# Altium PCB CropSenseMovement.PcbDoc
Units mm, origin at the board's own origin, x right, y up, seen from the top; angles counter-clockwise.
Board outline 92 x 71 mm, 2 copper layers (Top, Bottom), stack 1.57 mm thick; 55 components, 56 nets, 252 pads, 31 vias.
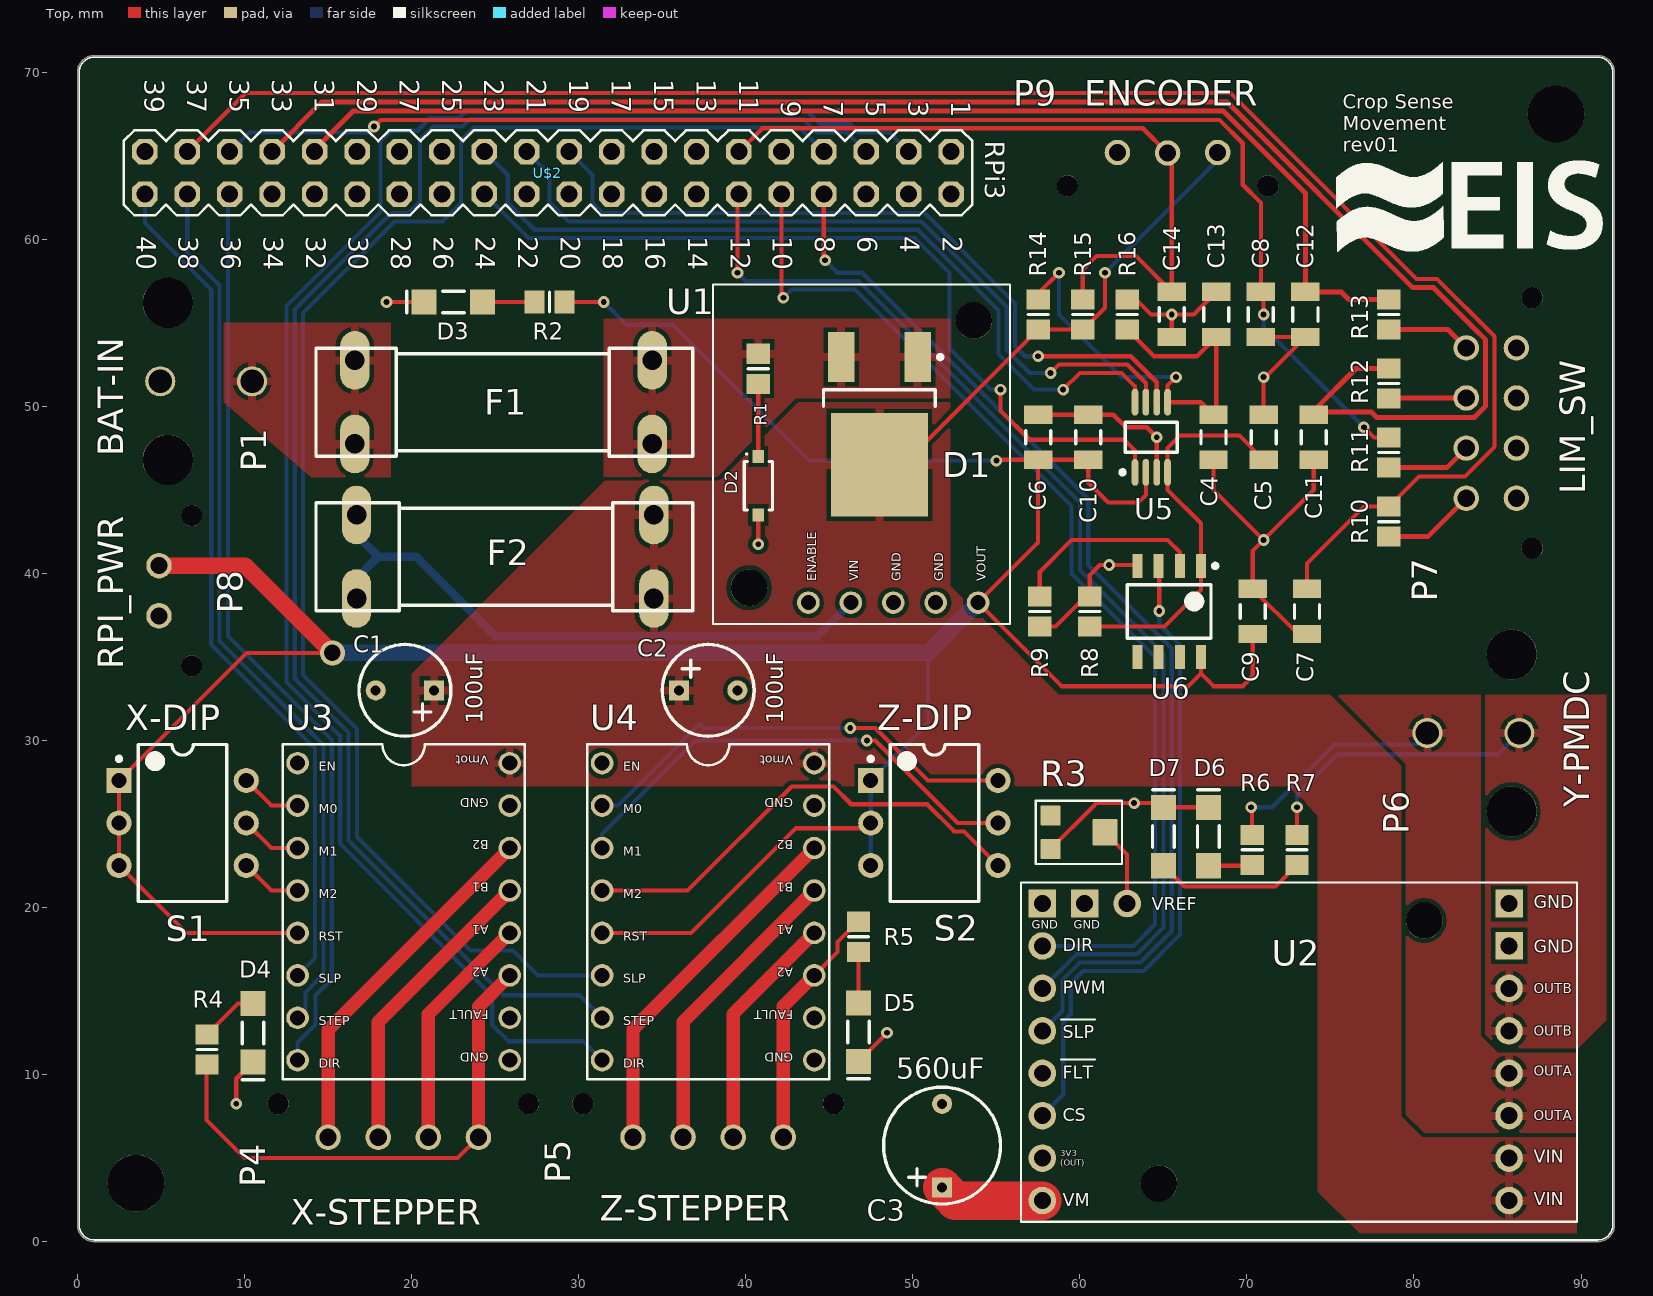
[diagram p0: Top view]
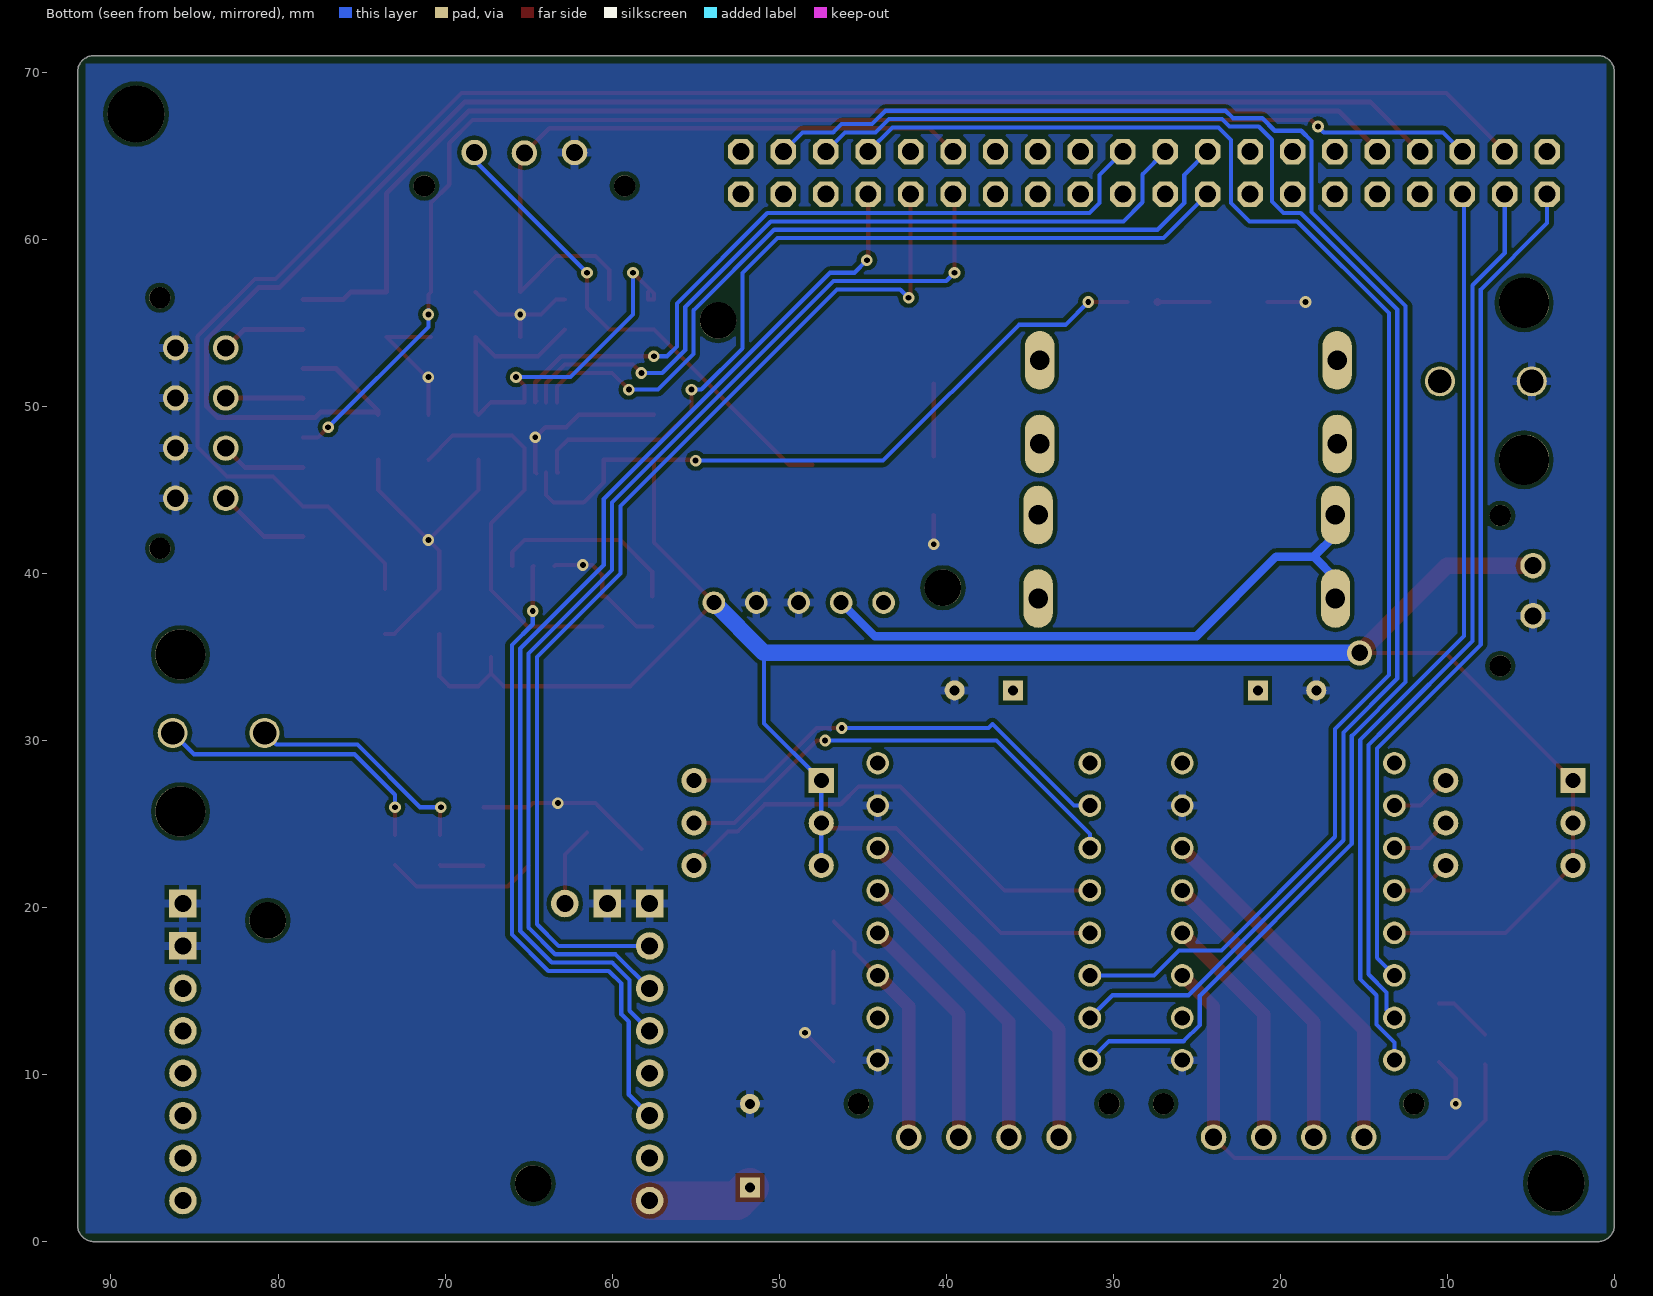
[diagram p1: Bottom view, seen from below]

## Layer stack, top to bottom
Top Solder: solder mask 0.0102, Solder Resist, Dk 3.5
Top: signal copper 0.035
Dielectric 1: core 1.5, FR-4, Dk 4.8
Bottom: signal copper 0.035
Bottom Solder: solder mask 0.0102, Solder Resist, Dk 3.5

## Board outline
0,1 0,70 cw(c1,70) 1,71 91,71 cw(c91,70) 92,70 92,1 cw(c91,1) 91,0 1,0 cw(c1,1) 0,1

## Design rules (kind name [scope] priority, off if disabled: settings)
Clearance [All] p1: gap=0.25
Clearance "Clearance (Same Net)" [All] p2: gap=0 except(0.203: SMDPad-SMDPad SMDPad-THPad SMDPad-Via)
HoleSize [All] p1: absolutevalues=TRUE maxlimit=6.2 minlimit=0.2 maxpercent=80.000 minpercent=20.000
HoleToHoleClearance mdViaViaSameLayer [All] p1: gap=0.203 allowstackedmicrovias=TRUE
HoleToHoleClearance [All] p2: gap=0.254 allowstackedmicrovias=TRUE
MinimumAnnularRing [All] p1: minimumring=0.15
MinimumSolderMaskSliver [All] p1: minsoldermaskwidth=0.045
PasteMaskExpansion mlMinCreamFrame [All] p1: expansion=0
PasteMaskExpansion [All] p2: expansion=0
PlaneConnect [All] p1: planeconnectstyle=Relief reliefexpansion=0.508 reliefentries=4 reliefconductorwidth=0.5 reliefairgap=0.254
PolygonConnect ThermalVias [IsVia] p1: connectstyle=Direct reliefconductorwidth=0.254 reliefentries=4 polygonreliefangle="90 Angle" airgapwidth=0.254
PolygonConnect [All] p2: connectstyle=Relief reliefconductorwidth=0.5 reliefentries=4 polygonreliefangle="90 Angle" airgapwidth=0.254
RoutingVias [All] p1: holewidth=0.35 width=0.7 viastyle="Through Hole" minholewidth=0.25 minwidth=0.5 maxholewidth=0.7 maxwidth=1.3
SilkToSilkClearance [All] p1 off: silktosilkclearance=0.254
SilkToSolderMaskClearance [IsPad] p1 off: minsilkscreentomaskgap=0.254 clearancetoexposedcopper=TRUE
SolderMaskExpansion mlMinStopFrame [All] p1: expansion=0.102
SolderMaskExpansion [All] p2: expansion=0.102
Width Width_HV [InNet('24V')] p1: maxlimit=5.5 minlimit=0.25 preferedwidth=5.22
Width [All] p2: maxlimit=4 minlimit=0.25 preferedwidth=0.25
23 further rules are at their usual default settings.

## Components (designator, comment, footprint, x,y, rotation, side; value= is the part's Value field where it differs from the comment)
C1 "100uF" "CAP 8MM" 21.35,33 r180 top
C2 "100uF" "CAP 8MM" 36,33 r0 top
C3 "560uF" "CAP 12.5MM" 51.75,3.25 r90 top
C4 "10nF" C1206 68,48.15 r270 top
C5 "10nF" C1206 71,48.15 r90 top
C6 "1uF" C1206 57.5,48.15 r270 top
C7 "100nF" C1206 73.595,37.725 r90 top
C8 "100nF" C1206 70.833,55.5 r90 top
C9 "10nF" C1206 70.345,37.725 r90 top
C10 "100nF" C1206 60.5,48.15 r270 top
C11 "100nF" C1206 74,48.15 r90 top
C12 "100nF" C1206 73.5,55.5 r90 top
C13 "1uF" C1206 68.167,55.5 r270 top
C14 "100nF" C1206 65.5,55.5 r90 top
D1 "MBRD835L" DPAK229P991X238-3N 48,48.85 r270 top
D2 "BZT52C24" SOD123 40.75,45.25 r90 top
D3 "GRN" "1206 SMD LED" 22.5,56.25 r180 top
D4 "BLU" "1206 SMD LED" 10.5,12.5 r270 top
D5 "BLU" "1206 SMD LED" 46.75,12.541 r270 top
D6 "BLU" "1206 SMD LED" 67.692,24.25 r90 top
D7 "RED" "1206 SMD LED" 65,24.25 r90 top
F1 "6A" 5X20MM_LITTLEFUSE_CARTRIDGE 25.5,50.25 r270 top
F2 "1A" 5X20MM_LITTLEFUSE_CARTRIDGE 25.6,41 r90 top
P1 "BAT-IN" MOLEX_MINI_1X2CCT 1.75,51.5 r270 top
P4 "X-STEPPER" MOLEX_MICRO_4X1CCT 19.5,8.75 r180 top
P5 "Z-STEPPER" MOLEX_MICRO_4X1CCT 37.75,8.75 r180 top
P6 "Y-PMDC" MOLEX_MINI_1X2CCT 89.504,30.45 r90 top
P7 "LIM_SW" MOLEX_MICRO_4X2CCT 88.629,49 r90 top
P8 "RPI_PWR" MOLEX_MICRO_2X1CCT 7.375,38.963 r90 top
P9 "ENCODER" MOLEX_MICRO_3X1CCT 65.25,62.696 r0 top
R1 "10K" 6-0805_N 40.75,52.25 r90 top
R2 "191" 6-0805_N 28.25,56.25 r0 top
R3 "50K" "TRIMPOT TC33" 60.05,24.5 r270 top
R4 "1.4K" 6-0805_N 7.75,11.5 r90 top
R5 "1.4K" 6-0805_N 46.75,18.25 r270 top
R6 "1.4K" 6-0805_N 70.308,23.448 r90 top
R7 "1.47K" 6-0805_N 73,23.448 r270 top
R8 "158K" 6-0805_N 60.595,37.725 r270 top
R9 "10K" 6-0805_N 57.595,37.725 r270 top
R10 "100K" 6-0805_N 78.5,43.1 r90 top
R11 "100K" 6-0805_N 78.5,47.233 r90 top
R12 "100K" 6-0805_N 78.5,51.367 r90 top
R13 "100K" 6-0805_N 78.5,55.5 r90 top
R14 "38.3K" 6-0805_N 57.5,55.5 r270 top
R15 "10K" 6-0805_N 60.167,55.5 r270 top
R16 "10K" 6-0805_N 62.833,55.5 r270 top
S1 "X-DIP" DIP-6 6.29,25.059 r0 top
S2 "Z-DIP" DIP-6 51.29,25.059 r0 top
U1 "DC/DC" D24VXXFX_BREAKOUT 46.925,47.14 r0 top
U2 "Y-DRIVER" 24V13_BREAKOUT 56.48,1.19 r0 top
U3 "X-DRIVER" DRV8825_BREAKOUT 19.521,19.75 r270 top
U4 "Z-DRIVER" DRV8825_BREAKOUT 37.75,19.75 r270 top
U5 "ADC082S021" TI-DGK8_N 64.275,48.15 r90 top
U6 "LM358DR" SOIC127P600X175-8N 65.345,37.725 r270 top
U$2 "RPI3-CON" CONNECTOR 28.16,63.98 r180 top

## Footprints (in the part's own frame and the unit in brackets; to place one, negate y for a bottom-side part, rotate by r counter-clockwise, add the part's x,y. Pads: shape width x height; smd on the part's side, far side on the other; paste and mask are expansions set on the pad)
5X20MM_LITTLEFUSE_CARTRIDGE [mm]
  oval 3.51x1.755 hole 1.17: 1(-2.5,-8.9) 1(2.5,-8.9) 2(-2.5,8.9) 2(2.5,8.9)
  silkscreen extent -3.23,-11.23 3.23,11.33
6-0805_N [mm] "Chip Resistor, Body 2.0x1.2mm, IPC Medium Density"
  rect 1.2x1.4 smd: 1(-0.9,0) 2(0.9,0)
  silkscreen extent 0,-0.6 0,0.6, body extent -1.07,-0.7 1.07,0.7, height 0.7
24V13_BREAKOUT [mil]
  round 65 hole 40: 3V3(50,150) CS(50,250) DIR(50,650) FLT(50,350) OUTA(1150,250) OUTA(1150,350) OUTB(1150,450) OUTB(1150,550) PWM(50,550) SLP(50,450) VIN(1150,50) VIN(1150,150) VM(50,50) VREF(250,750)
  rect 65x65 hole 40: GND(50,750) GND(150,750) GND(1150,650) GND(1150,750)
  round 85.98 hole 85.98 unplated: HOLE(325,90) HOLE(950,710)
  silkscreen extent 0,0 1310,800
"1206 SMD LED" [mm] "Chip Diode, 2-Leads, Body 3.20x1.60mm, IPC Medium Density"
  rect 1.5x1.5 smd: 1(-1.75,0) 2(1.75,0)
  silkscreen extent -0.65,-0.65 2.8,0.65, body extent -1.6,-0.8 1.6,0.8, height 1.1
C1206 [mm] "Chip Capacitor, Body 3.2x1.6mm, IPC High Density"
  rect 1.1x1.7 smd: 1(-1.35,0) 2(1.35,0)
  silkscreen extent -0.4,-0.75 0.4,0.75, body extent -1.7,-0.9 1.7,0.9, height 1.3
"CAP 8MM" [mm]
  rect 1.2x1.2 hole 0.6: 1(0,0)
  round 1.2 hole 0.6: 2(3.5,0)
  silkscreen extent -1,-2.75 4.5,2.75
"CAP 12.5MM" [mm]
  rect 1.2x1.2 hole 0.6: 1(0,0)
  round 1.2 hole 0.6: 2(5,0)
  silkscreen extent -1,-3.5 6,3.5
CONNECTOR [mil]
  oct 60x60 hole 40: 1(-950,-50) 2(-950,50) 3(-850,-50) 4(-850,50) 5(-750,-50) 6(-750,50) 7(-650,-50) 8(-650,50) 9(-550,-50) 10(-550,50) 11(-450,-50) 12(-450,50) 13(-350,-50) 14(-350,50) 15(-250,-50) 16(-250,50) 17(-150,-50) 18(-150,50) 19(-50,-50) 20(-50,50) 21(50,-50) 22(50,50) 23(150,-50) 24(150,50) 25(250,-50) 26(250,50) 27(350,-50) 28(350,50) 29(450,-50) 30(450,50) 31(550,-50) 32(550,50) 33(650,-50) 34(650,50) 35(750,-50) 36(750,50) 37(850,-50) 38(850,50) 39(950,-50) 40(950,50)
  silkscreen extent -1000,-100 1000,100
D24VXXFX_BREAKOUT [mil]
  round 53.15 hole 35.43: EN(-125,-350) GND(75,-350) GND(175,-350) VIN(-25,-350) VOUT(275,-350)
  round 86 hole 86 unplated: HOLE(-265,-315) HOLE(265,315)
  silkscreen extent -350,-400 350,400
DIP-6 [mm] "DIP; 6 Leads; Row Spacing 7.62 mm; Pitch 2.54 mm"
  rect 1.5x1.5 hole 0.9: 1(-3.81,2.54)
  round 1.5 hole 0.9: 2(-3.81,0) 3(-3.81,-2.54) 4(3.81,-2.54) 5(3.81,0) 6(3.81,2.54)
  silkscreen extent -3.93,-4.7 2.65,4.7, body extent -3.55,-4.7 3.55,4.7, height 5.46
DPAK229P991X238-3N [mm] "D-PAK, 3-Pads, Body 6.21x6.73mm (max), IPC Medium Density"
  rect 3x1.6 smd: 1(-4.1,2.29) 1(-4.1,-2.29)
  rect 6.2x5.8 smd: 2(2.35,0)
  silkscreen extent -4.22,-3.35 -1.15,3.77, body extent -5.1,-3.37 4.81,3.37, height 2.51
DRV8825_BREAKOUT [mm]
  round 1.35 hole 0.9: A1(1.27,6.35) A2(3.81,6.35) B1(-1.27,6.35) B2(-3.81,6.35) DIR(8.89,-6.35) EN(-8.89,-6.35) FAULT(6.35,6.35) GND(-6.35,6.35) GND(8.89,6.35) M0(-6.35,-6.35) M1(-3.81,-6.35) M2(-1.27,-6.35) RST(1.27,-6.35) SLP(3.81,-6.35) STEP(6.35,-6.35) VMOT(-8.89,6.35)
  silkscreen extent -10.03,-7.24 10.03,7.24
MOLEX_MICRO_2X1CCT [mm]
  round 1.524 hole 1.02: 1(1.5,2.5) 2(-1.5,2.5)
  round 1.27 hole 1.27 unplated: HOLE(-4.5,0.54) HOLE(4.5,0.54)
  body extent -4.83,0 4.83,5.6, height 9.95
MOLEX_MICRO_3X1CCT [mm]
  round 1.524 hole 1.02: 1(3,2.5) 2(0,2.47) 3(-3,2.5)
  round 1.27 hole 1.27 unplated: HOLE(-6,0.5) HOLE(6,0.5)
  body extent -6.32,0 6.33,5.61, height 9.95
MOLEX_MICRO_4X1CCT [mm]
  round 1.524 hole 1.02: 1(4.5,2.5) 2(1.5,2.5) 3(-1.5,2.5) 4(-4.5,2.5)
  round 1.27 hole 1.27 unplated: HOLE(-7.5,0.5) HOLE(7.5,0.5)
  body extent -7.82,0 7.82,5.6, height 9.95
MOLEX_MICRO_4X2CCT [mm]
  round 1.524 hole 1.02: 1(-4.5,5.5) 2(-1.5,5.5) 3(1.5,5.5) 4(4.5,5.5) 5(-4.5,2.5) 6(-1.5,2.5) 7(1.5,2.5) 8(4.5,2.5)
  round 1.27 hole 1.27 unplated: HOLE(-7.5,1.56) HOLE(7.5,1.56)
  body extent -8.08,-0.83 8.07,7.94, height 9.95
MOLEX_MINI_1X2CCT [mm]
  round 1.8 hole 1.4: 1(0,8.7) 2(0,3.2)
  round 3 hole 3 unplated: HOLE(-4.7,3.66) HOLE(4.7,3.66)
  body extent -6.09,0 6.09,11, height 12.8
SOD123 [mm] "SODFL, 2-Leads, Body 1.55x3.70mm, IPC Medium Density"
  rect 0.8x0.7 smd: 1(-1.75,0) 2(1.75,0)
  silkscreen extent -1.45,-0.85 1.95,0.85, body extent -1.42,-0.85 1.43,0.85, height 1.45
SOIC127P600X175-8N [mm] "SOIC, 8-Leads, Body 4.90x3.90mm, Pitch 1.27mm, IPC Medium Density"
  rect 1.45x0.6 smd: 1(-2.725,1.905) 2(-2.725,0.635) 3(-2.725,-0.635) 4(-2.725,-1.905) 5(2.725,-1.905) 6(2.725,-0.635) 7(2.725,0.635) 8(2.725,1.905)
  silkscreen extent -2.85,-2.5 1.6,2.88, body extent -3,-2.5 3,2.5, height 1.75
TI-DGK8_N [mm] "SOP, 8-Leads, Body 3x3mm, Pitch 0.65mm, IPC Medium Density"
  oval 1.6x0.4 smd: 1(-2.1,0.975) 2(-2.1,0.325) 3(-2.1,-0.325) 4(-2.1,-0.975) 5(2.1,-0.975) 6(2.1,-0.325) 7(2.1,0.325) 8(2.1,0.975)
  silkscreen extent -2.22,-1.55 0.9,1.85, body extent -1.55,-1.55 1.55,1.55, height 1.1
"TRIMPOT TC33" [mm]
  rrect10% 1.2x1.2 smd: 1(-1,-1.8) 3(1,-1.8)
  rrect10% 1.6x1.5 smd: 2(0,1.45)
  silkscreen extent -1.89,-2.69 1.89,2.47

## Part data
C1 C2 C3: library part "Cap Pol", "Polarized Capacitor (Axial)"
C4 C5 C6 C7 C8 C9 C10 C11 C12 C13 C14: library part "Cap Semi", "Capacitor (Semiconductor SIM Model)"
D1: library part "D Schottky", "Schottky Diode"
D2: library part "D Zener", "Zener Diode"
D3 D4 D5 D6 D7: library part LED, "Typical INFRARED GaAs LED"
F1 F2: library part FUSE_5X20_LITTLEFUSE, "5mm x 20mm Littlefuse Cartridge"
P1 P6: library part MOLEX_MINI_1X2, "Molex Mini Fit 2 cct Double Row"
P4 P5: library part MOLEX_MICRO_4x1, "MOLEX_MICRO_4x1"
P7: library part MOLEX_MICRO_4X2, "Molex Micro Fit 8 cct Double Row"
P8: library part MOLEX_MICRO_2x1, "Molex Micro Fit 2 cct Single Row"
P9: library part MOLEX_MICRO_3x1, "Molex Micro Fit 3 cct Single Row"
R1 R2 R4 R5 R6 R7 R8 R9 R10 R11 R12 R13 R14 R15 R16: library part Res3, "Resistor"
R3: library part RPot, "TRIMMER 50K OHM 0.1W SMD"
S1 S2: library part "SW DIP-3", "DIP Switch, 3 Position, SPST"
U1: library part D24V50F5
U2: library part 24V13_BREAKOUT
U3 U4: library part DRV8825_BREAKOUT
U5: library part CMP-0003-00004-1, "2 Channel, 50 to 200 kSPS 8-Bit ADC, -40 to 85 degC, 8-pin SOP (DGK8), Green (RoHS & no Sb/Br)"
U$2: library part RPI3_CON

## Free pads (board coordinates)
  round 3.4 hole 3.4 unplated: HOLE(3.5,3.5) HOLE(88.5,67.5)

## Via types
v1: diameter 0.7, hole 0.35, Top to Bottom, 30 vias
v2: diameter 1.5, hole 1, Top to Bottom, 1 vias

## Nets (pads, with @x,y where several pads share a name; then routed paths per layer and width w, separated by ;. In a path a pad name is that pad's centre, name@x,y a point inside that pad or via, vN(x,y) a via of type N, cw(c..) or ccw(c..) an arc to the next point about the centre after c; other vN are vias at no path point)
5V: C6.2 C9.1 C10.2 P8.1 R2.2 S1.1 S1.2 S1.3 S2.1 S2.2 S2.3 U1.VOUT U3.RST U4.RST U5.2 U6.8 | length 194.2
  Top w0.25: U3.RST 6.519,18.48 S1.3 S1.2 S1.1 10.126,35.245 v2(15.255,35.245) ; R2.2 v1(31.5,56.25) ; U4.RST 36.73,18.48 43,24.75 47.171,24.75 S2.2 ; v1(55,46.75) 55.05,46.8 C6.2 ; U5.2 63.95,44.7 63.5,44.25 61.7,44.25 60.5,45.45 C10.2 C6.2 ; U6.8 67.25,34 ; C9.1 70.345,33.845 69.75,33.25 68,33.25 67.25,34 ; C6.2 57.5,41.84 U1.VOUT 58.91,33.25 66.5,33.25 67.25,34
  Top w1: P8.1 10.037,40.463 v2(15.255,35.245)
  Bottom w0.25: U4.RST@31.08,18.48 U4.RST ; v1(31.5,56.25) 32.87,54.88 35.653,54.88 43.783,46.75 v1(55,46.75) ; S2.3 S2.2 S2.1 50.905,31.024 50.905,35.245
  Bottom w1: v2(15.255,35.245) 50.905,35.245 U1.VOUT
24V: C1.1 C2.1 D1.2 F2.1 P9.1 R14.2 R15.2 U2.VIN U3.VMOT U4.VMOT | length 29.6
  Top w0.25: D1.2 49.4,46.5 R14.2 R15.2 60.197,54.6 61.5,55.903 v1(61.5,58)
  Top w0.5: U3.VMOT@25.71,28.64 U3.VMOT
  Bottom w0.25: v1(61.5,58) 68.25,64.75 P9.1
CS-ADC: U5.1 U$2.24 | length 50
  Top w0.25: v1(55.25,51) 55.25,49.75 57,48 62.65,48 63.3,47.35 U5.1 U5.1@63.243,46.05
  Bottom w0.25: U$2.24 26.987,60.073 50.092,60.073 52.189,57.976 52.189,53.475 54.664,51 v1(55.25,51)
GND: C1.2 C2.2 C3.2 C4.2 C5.2 C6.1 C7.1 C8.1 C9.2 C10.1 C11.1 C12.1 C13.1 C14.1 D2.1 D3.2 D4.2 D5.2 D6.2 D7.2 P1.2 P7.5 P7.6 P7.7 P7.8 P8.2 P9.3 R3.3 R8.1 R9.2 R16.1 U1.GND U2.GND U3.GND U4.GND U5.3 U6.4 | length 73.8
  Top w0.25: v1(9.5,8.25) 9.5,9.75 D4.2 ; v1(18.5,56.25) D3.2 ; v1(40.75,41.75) D2.1 ; D5.2 v1(48.459,12.5) ; C6.1 C10.1 62,49.5 62.75,48.75 64,48.75 v1(64.6,48.15) U5.3 U5.3@64.525,45.975 ; R9.2 58.545,36.825 60.345,38.625 R8.1 60.595,39.905 61.19,40.5 v1(61.75,40.5) 63.39,40.5 U6.4 ; R3.3 60.75,26 61,26.25 v1(63.25,26.25) 64.75,26.25 D7.2 D6.2 ; R16.1 63.35,56.4 64.25,55.5 v1(65.5,55.5) ; C14.1 v1(65.5,55.5) ; C4.2 68,45 v1(71,42) ; C13.1@68.167,56.817 C13.1 66.817,55.5 v1(65.5,55.5) ; C8.1 C12.1 71.1,51.75 v1(71,51.75) C5.2 ; C7.1 73.045,36.375 C9.2 70.345,41.345 v1(71,42) ; C11.1 74,45 v1(71,42)
  Bottom w0.25: P9.3 P9.3@62.25,65.25
MISO: U5.7 U$2.21 | length 46.8
  Top w0.25: v1(58.25,52) 58.75,52.5 62.836,52.5 63.95,51.386 U5.7
  Bottom w0.25: U$2.21 28.25,63.89 28.25,62.217 29.394,61.073 50.506,61.073 55.623,55.956 55.623,53.377 57,52 v1(58.25,52)
MOSI: U5.6 U$2.19 | length 44.7
  Top w0.25: v1(57.5,53) 63.043,53 64.6,51.443 U5.6 U5.6@64.525,50.325
  Bottom w0.25: U$2.19 30.833,63.847 30.833,62.174 31.434,61.573 50.713,61.573 56.123,56.163 56.123,53.584 56.707,53 v1(57.5,53)
NetC3_1: C3.1 U2.VM | length 6.3
  Top w2.3: C3.1 52.54,2.46 U2.VM
NetD1_1: D1.1 F1.2 R1.2
NetD2_2: D2.2 R1.1 | length 4.3
  Top w0.25: D2.2 R1.1
NetD3_1: D3.1 R2.1 | length 3.1
  Top w0.25: D3.1 R2.1
NetD4_1: D4.1 R4.2 | length 3.5
  Top w0.25: R4.2 9.6,14.25 D4.1
NetD5_1: D5.1 R5.2 | length 3.1
  Top w0.25: D5.1 R5.2
NetD6_1: D6.1 R6.1 | length 2.6
  Top w0.25: D6.1 70.26,22.5 R6.1
NetD7_1: D7.1 R7.2 | length 9.1
  Top w0.25: D7.1 66.25,21.25 71.702,21.25 R7.2
NetF1_1: F1.1 P1.1
NetF2_2: F2.2 U1.VIN | length 37.2
  Bottom w0.5: F2.2@16.7,38.5 16.7,39.7 18,41 ; F2.2@16.7,43.5 16.7,42.3 18,41 ; U1.VIN 44.285,36.245 25.005,36.245 20.25,41 18,41
NetP4_1: P4.1 U3.B2 | length 21.8
  Top w0.8: P4.1 15,12.689 U3.B2
NetP4_2: P4.2 U3.B1 | length 18
  Top w0.8: P4.2 18,13.149 U3.B1
NetP4_3: P4.3 U3.A1 | length 14.2
  Top w0.8: P4.3 21,13.609 U3.A1
NetP4_4: P4.4 R4.1 U3.A2 | length 31.5
  Top w0.25: R4.1 7.725,10.575 7.725,7.275 10,5 22.75,5 P4.4
  Top w0.8: P4.4 24,14.069 U3.A2
NetP5_1: P5.1 U4.B2 | length 21.8
  Top w0.8: P5.1 33.25,12.71 U4.B2
NetP5_2: P5.2 U4.B1 | length 18
  Top w0.8: P5.2 36.25,13.17 U4.B1
NetP5_3: P5.3 U4.A1 | length 14.2
  Top w0.8: P5.3 39.25,13.63 U4.A1
NetP5_4: P5.4 R5.1 U4.A2 | length 14.8
  Top w0.25: U4.A2 45.5,17.34 45.5,17.93 R5.1@46.72,19.15
  Top w0.8: P5.4 42.25,14.09 U4.A2
NetP6_1: P6.1 R6.2 U2.OUTA | length 14.1
  Top w0.25: v1(70.25,26) 70.308,25.942 R6.2
  Bottom w0.25: v1(70.25,26) 71.5,26 75.25,29.75 80.104,29.75 P6.1
NetP6_2: P6.2 R7.1 U2.OUTB | length 17.2
  Top w0.25: R7.1 v1(73,26)
  Bottom w0.25: v1(73,26) 73,26.75 75.425,29.175 85.029,29.175 P6.2
NetP7_1: P7.1 R10.1 | length 5.6
  Top w0.3: R10.1 80.829,42.2 P7.1
NetP7_2: P7.2 R11.1 | length 5.1
  Top w0.3: R11.1 81.962,46.333 P7.2
NetP7_3: P7.3 R12.1 | length 4.6
  Top w0.3: R12.1 78.533,50.5 P7.3
NetP7_4: P7.4 R13.1 | length 5.1
  Top w0.3: R13.1 82.029,54.6 P7.4
NetR3_2: R3.2 U2.VREF | length 4.8
  Top w0.25: R3.2 62.83,23.17 U2.VREF
NetR9_1: R9.1 U6.2 | length 11.8
  Top w0.25: R9.1 57.595,40.095 59.5,42 65.25,42 65.98,41.27 U6.2
NetS1_4: S1.4 U3.M2 | length 3.7
  Top w0.25: S1.4 11.599,21.02 U3.M2
NetS1_5: S1.5 U3.M1 | length 3.7
  Top w0.25: S1.5 11.599,23.56 U3.M1
NetS1_6: S1.6 U3.M0 | length 3.7
  Top w0.25: S1.6 11.599,26.1 U3.M0
NetS2_4: S2.4 U4.M2 | length 28.2
  Top w0.25: U4.M2 36.52,21.02 42.75,27.25 45.25,27.25 46.316,26.184 50.859,26.184 52.484,24.559 53.06,24.559 S2.4
NetS2_5: S2.5 U4.M1 | length 28.9
  Top w0.25: v1(47.25,30) 47.75,30 52.691,25.059 S2.5
  Bottom w0.25: U4.M1 31.4,24.4 37,30 v1(47.25,30)
NetS2_6: S2.6 U4.M0 | length 27.1
  Top w0.25: v1(46.25,30.75) 47.75,30.75 50.901,27.599 S2.6
  Bottom w0.25: U4.M0 32.35,26.1 37.234,30.984 37.468,30.75 v1(46.25,30.75)
SCLK: U5.8 U$2.23 | length 49.1
  Top w0.25: v1(59,51) 60,52 62.5,52 63.3,51.2 U5.8
  Bottom w0.25: U$2.23 25.753,63.847 25.753,62.174 27.354,60.573 50.299,60.573 55.123,55.749 55.123,53.127 57.25,51 v1(59,51)
VBAT-A: C4.1 C13.2 R14.1 R16.2 U5.5 | length 29.9
  Top w0.25: R14.1@57.85,56.85 57.85,56.4 R14.1 57.5,56.75 v1(58.75,58) ; R16.2 64.433,53 67.017,53 C13.2 68.167,49.667 C4.1 67.25,50.25 U5.5 65.25,51.25 v1(65.75,51.75)
  Bottom w0.25: v1(58.75,58) 58.75,55.5 62.5,51.75 v1(65.75,51.75)
X-DIR: U3.DIR U$2.36 | length 55.6
  Bottom w0.25: U$2.36@8.75,62.35 U$2.36 ; U$2.36@9,62.5 9,36.25 15.221,30.029 15.221,15.721 14.25,14.75 14.25,12.994 13.171,11.915 U3.DIR
X-MAX: C7.2 R10.2 U$2.37 | length 108
  Top w0.25: U$2.37 10.07,68.75 69.02,68.75 80.142,57.628 81.386,57.628 84.816,54.199 84.816,47.579 83.045,45.808 80.308,45.808 R10.2 77,44 73.595,40.595 C7.2
X-MIN: C8.2 R11.2 U$2.35 | length 84
  Top w0.25: v1(17.75,66.75) 18.15,67.15 68.35,67.15 69.75,65.75 69.75,63.267 70.833,62.184 C8.2 71,56.683 v1(71,55.5) ; v1(77,48.75) 77.617,48.133 R11.2
  Bottom w0.25: U$2.35 10.26,66.4 17.4,66.4 v1(17.75,66.75) ; v1@71,55.75 v1(71,55.5) 71,54.75 v1(77,48.75)
X-SLP: U3.SLP U$2.40 | length 51.4
  Bottom w0.25: U$2.40 4.03,60.97 8,57 8,35.75 14.221,29.529 14.221,16.99 U3.SLP
X-STEP: U3.STEP U$2.38 | length 53.3
  Bottom w0.25: U$2.38 6.57,59.18 8.5,57.25 8.5,35.957 13.604,30.854 14.721,29.736 14.721,16.005 13.638,14.922 13.638,13.866 U3.STEP
Y-CS: U2.CS U6.3 | length 39
  Top w0.25: U6.3 64.75,40.41 v1(64.75,37.75)
  Bottom w0.25: U2.CS 59,8.79 59,13.163 59.451,13.613 59.451,15.446 60.204,16.2 63.821,16.2 66,18.379 66,35.707 64.75,36.957 v1(64.75,37.75)
Y-CS-A: C5.1 R8.2 U5.4 U6.1 | length 23.5
  Top w0.25: R8.2 65.075,36.825 67.25,39 U6.1 67.25,43 65.25,45 U5.4 65.25,47.5 66,48.25 69.55,48.25 C5.1
Y-DIR: U2.DIR U$2.10 | length 63.5
  Top w0.25: U$2.10 42.13,56.62 v1(42.25,56.5)
  Bottom w0.25: v1(42.25,56.5) 42.75,57 46.543,57 59.5,44.043 59.5,40 64.5,35 64.5,19 63.2,17.7 U2.DIR
Y-ENC: C14.2 P9.2 R15.1 U$2.11 | length 43.6
  Top w0.25: U$2.11 40.99,66.65 63.765,66.65 P9.2 65.5,64.915 C14.2 63.35,59 61,59 60.167,58.167 R15.1
Y-PWM: U2.PWM U$2.12 | length 67.2
  Top w0.25: v1(39.5,58) 39.5,62.62 U$2.12
  Bottom w0.25: v1(39.5,58) 40,57.5 46.75,57.5 60,44.25 60,40.207 65,35.207 65,18.793 63.407,17.2 59.79,17.2 U2.PWM
Y-SLP: U2.SLP U$2.8 | length 64.9
  Top w0.25: U$2.8 44.67,58.83 v1(44.75,58.75)
  Bottom w0.25: v1(44.75,58.75) 45.5,58 46.957,58 60.5,44.457 60.5,40.5 65.5,35.5 65.5,18.586 63.614,16.7 59.997,16.7 58.951,15.653 58.951,13.821 U2.SLP
Z-DIR: U4.DIR U$2.3 | length 101.2
  Bottom w0.25: U4.DIR 30.26,12 25.787,12 24.821,12.965 24.821,14.721 15.721,23.822 15.721,30.279 12.5,33.5 12.5,56 18.133,61.633 18.133,65.883 18.75,66.5 20.336,66.5 21.086,67.25 22.836,67.25 23.283,67.697 43.637,67.697 44.434,66.9 46.267,66.9 46.767,66.4 48.6,66.4 U$2.3
Z-MAX: C11.2 R12.2 U$2.33 | length 100.3
  Top w0.3: U$2.33 14.625,68.225 68.803,68.225 79.924,57.103 81.169,57.103 83.61,54.662 84.291,53.981 84.291,53.019 84.291,50.981 84.291,50.019 83.61,49.338 77.763,49.338 77.451,49.65 74.15,49.65 C11.2 74,49.735 76.532,52.267 R12.2
Z-MIN: C12.2 R13.2 U$2.31 | length 73.5
  Top w0.3: U$2.31 14.19,65.359 16.506,67.675 68.575,67.675 73.5,62.75 C12.2 75.65,56.85 76.1,56.4 R13.2
Z-SLP: U4.SLP U$2.7 | length 89.4
  Bottom w0.25: U4.SLP 27.56,15.94 26.07,17.43 23.527,17.43 16.721,24.236 16.721,30.693 13.5,33.914 13.5,55.586 18.987,61.073 21.846,61.073 22.947,62.174 22.947,65.947 23.697,66.697 43.223,66.697 U$2.7
Z-STEP: U4.STEP U$2.5 | length 94.6
  Bottom w0.25: U4.STEP 30.05,14.75 25.5,14.75 16.221,24.029 16.221,30.486 13,33.707 13,55.793 18.78,61.573 19.806,61.573 20.5,62.267 20.5,65.957 21.293,66.75 23.043,66.75 23.49,67.197 43.43,67.197 44.227,66.4 46.06,66.4 U$2.5
pads on no net: P1.HOLE P4.HOLE P5.HOLE P6.HOLE P7.HOLE P8.HOLE P9.HOLE R3.1 U1.EN U1.HOLE U2.3V3 U2.FLT U2.HOLE U3.EN U3.FAULT U4.EN U4.FAULT U6.5 U6.6 U6.7 U$2.1 U$2.2 U$2.4 U$2.6 U$2.9 U$2.13 U$2.14 U$2.15 U$2.16 U$2.17 U$2.18 U$2.20 U$2.22 U$2.25 U$2.26 U$2.27 U$2.28 U$2.29 U$2.30 U$2.32 U$2.34 U$2.39

## Polygon pours and split planes (outlines as drawn)
NetP6_2 on Top "NETP6_2_L01_P010" (solid, remove dead copper, pour order 10): 84.25,32.75 91.5,32.75 91.5,13.25 89.75,11.5 85,11.5 84.25,12.25
NetP6_1 on Top "NETP6_1_L01_P008" (solid, remove dead copper, pour order 8): 79.5,28.5 75.25,32.75 84,32.75 84,12.31 85,11.31 89.75,11.31 89.75,6.5 80.5,6.5 79.5,7.5
NetF1_1 on Top "NETF1_1_L01_P002" (solid, remove dead copper, pour order 2): 18.75,55 18.75,45.75 16.5,45.75 14,45.75 8.75,50.25 8.75,55
NetD1_1 on Top "NETD1_1_L01_P004" (solid, remove dead copper, pour order 4): 31.5,55.25 52.25,55.25 52.25,50.5 43,50.5 38.3,45.8 31.5,45.8
24V on Top "24V_L01_P006" (solid, remove dead copper, pour order 6): 20,34 20,27.25 72.5,27.25 74.25,25.5 74.25,3 76.75,0.5 89.75,0.5 89.75,6.25 80.5,6.25 79.25,7.5 79.25,28.5 75,32.75 58.75,32.75 52.25,39.25 52.25,50.25 43.15,50.25 38.5,45.6 31.6,45.6
GND on Bottom "GND_L02_P000" (solid, remove dead copper, pour order 0): 0.5,70.5 0.5,0.5 91.5,0.5 91.5,70.5

## Silkscreen, mask and mechanical layers (free items; w line width, h text height)
Top Overlay:
  drawing of 1436 lines, arcs and shapes, not listed
  text "Crop Sense / Movement / rev01" at 75.75,65.25 h0.85
Dimension:
  lines w0.1: 0,70 cw(c1,70) 1,71 ; 0,70.1 0,1 ccw(c1,1) 1,0 91,0 ccw(c91,1) 92,1 ; 0.9,71 91,71 cw(c91,70) 92,70 92,1 ; 92,1 92,1
Unrouted:
  lines w0: 2.58,25.39 7.58,25.39 9.525,2.54 24.13,8.89 ; 3.11,51.81 2.58,43.19 7.58,43.19 53,53 59.35,53.89 70,53 76.35,53.89 ; 11.176,0.635 13.716,0.635 ; 11.47,25.39 16.47,25.39 23.57,20.26 ; 11.47,43.19 16.47,43.19 20.168,43.18 18.35,51.81 ; 14.605,2.54 24.245,5.14 24.13,11.43 ; 16.256,0.635 23.356,0.695 ; 20.32,27.94 29.07,20.26 24.13,11.43 ; 20.32,38.1 23.012,43.18 ; 24.245,2.6 32.385,4.85 54.27,36.46 54.27,39 54.27,41.54 ; 25.82,71.46 46.65,41.19 ; 28.36,71.46 46.65,38.65 ; 28.36,74 81.492,52.59 83.92,8.79 ; 30.9,71.46 46.65,36.11 ; 30.9,74 85.19,57.02 87.842,52.56 ; 33.424,33.505 58.36,21.28 ; 33.424,34.775 78.36,21.28 86.282,20.28 91.708,52.71 ; 33.424,36.045 94.248,40.63 95.822,27.28 ; 33.44,74 91.54,20.25 87.842,15.79 ; 35.98,71.46 92.71,76.2 82.702,5.08 70.89,6.35 ; 35.98,74 83.92,35.87 92.302,36.14 ; 38.52,74 68.91,22.43 ; 38.656,34.775 70.81,20.13 92.978,27.28 ; 38.656,36.045 55.36,21.28 48.036,6.685 44.7,3.11 ; 43.6,71.46 63.65,41.19 ; 46.14,71.46 63.65,38.65 ; 46.14,74 70.81,22.43 ; 46.65,43.73 54.27,41.54 ; 46.65,46.27 51.73,36.46 ; 46.65,48.81 51.73,39 ; 46.65,51.35 51.73,41.54 ; 48.036,2.875 44.7,6.11 58.36,21.28 ; 48.036,4.145 97.092,40.63 ; 48.036,5.415 94.552,52.71 ; 48.68,71.46 63.65,36.11 ; 48.68,74 69.86,22.43 ; 49.48,16.26 58.704,4.145 64.828,12.72 75.292,13.37 ; 51.84,28.75 59.35,43.73 ; 51.84,31.75 59.35,48.81 ; 54.84,28.75 59.35,41.19 ; 54.84,31.75 59.35,46.27 ; 58.704,2.875 65.37,7.37 78.74,11.43 ; 58.704,5.415 58.704,6.685 ; 59.35,36.11 53,47 59.35,51.35 70,47 76.35,51.35 ; 62.36,21.28 68.91,20.13 ; 63.65,46.27 68.73,36.46 ; 63.65,48.81 68.73,39 ; 63.65,51.35 68.73,41.54 ; 67.672,12.72 82.702,27.94 ; 68.35,28.75 76.35,43.73 ; 68.35,31.75 76.35,48.81 ; 71.27,36.46 71.27,39 71.27,41.54 63.65,43.73 54.27,41.54 ; 71.35,28.75 76.35,41.19 ; 71.35,31.75 76.35,46.27 ; 74.08,74 95.71,76.2 68.91,20.13 ; 76.35,36.11 81.51,35.56 ; 78.648,52.59 95.94,66.04 ; 79.858,5.08 68.91,20.13 ; 79.858,27.94 81.28,11.43 ; 83.438,20.28 75.36,21.28 69.86,20.13 65.36,21.28 58.36,21.28 ; 84.998,15.79 89.94,66.04 ; 84.998,52.56 92.94,66.04 ; 86.94,66.04 89.458,36.14 ; 86.94,69.04 89.94,69.04 92.94,69.04 ; 95.94,69.04 92.94,69.04 ; 24.13,11.43 32.385,7.85 52.48,16.26 58.704,6.685 ; 58.704,6.685 68.37,7.37 73.89,6.35 72.448,13.37 80.01,13.335 86.92,8.79 94.54,20.25 86.92,35.87 81.51,35.56 ; 76.35,51.35 88.19,57.02 92.94,69.04 ; 76.35,51.35 89.71,76.2 81.51,35.56

## Text inside footprints (layer, text, board x,y; h text height)
U1: Top Overlay "ENABLE" at 44.385,39.52 h0.94 r90; Top Overlay "VIN" at 46.925,39.52 h0.94 r90; Top Overlay "GND" at 49.465,39.52 h0.94 r90; Top Overlay "VOUT" at 54.545,39.52 h0.94 r90; Top Overlay "GND" at 52.005,39.52 h0.94 r90
U2: Top Overlay "3V3 / (OUT)" at 58.815,4.542 h0.38; Top Overlay "GND" at 57.11,18.72 h0.5; Top Overlay "PWM" at 58.967,14.829 h0.76; Top Overlay "DIR" at 58.967,17.369 h0.76; Top Overlay "GND" at 59.62,18.72 h0.5; Top Overlay "VREF" at 64.29,19.84 h0.76; Top Overlay "SLP" at 58.967,12.162 h0.76; Top Overlay "FLT" at 58.967,9.749 h0.76; Top Overlay "CS" at 58.967,7.209 h0.76; Top Overlay "VM" at 58.967,2.129 h0.76; Top Overlay "GND" at 87.159,19.959 h0.76; Top Overlay "GND" at 87.159,17.292 h0.76; Top Overlay "OUTB" at 87.159,14.879 h0.6; Top Overlay "OUTB" at 87.159,12.339 h0.6; Top Overlay "OUTA" at 87.159,9.926 h0.6; Top Overlay "OUTA" at 87.159,7.259 h0.6; Top Overlay "VIN" at 87.159,4.719 h0.76; Top Overlay "VIN" at 87.159,2.179 h0.76
U3: Top Overlay "SLP" at 14.441,15.305 h0.94; Top Overlay "GND" at 24.601,11.495 h0.94 r180; Top Overlay "FAULT" at 24.601,14.035 h0.94 r180; Top Overlay "A2" at 24.601,16.575 h0.94 r180; Top Overlay "A1" at 24.601,19.115 h0.94 r180; Top Overlay "B1" at 24.601,21.655 h0.94 r180; Top Overlay "B2" at 24.601,24.195 h0.94 r180; Top Overlay "GND" at 24.601,26.735 h0.94 r180; Top Overlay "Vmot" at 24.601,29.275 h0.94 r180; Top Overlay "DIR" at 14.441,10.225 h0.94; Top Overlay "STEP" at 14.441,12.765 h0.94; Top Overlay "RST" at 14.441,17.845 h0.94; Top Overlay "M2" at 14.441,20.385 h0.94; Top Overlay "M1" at 14.441,22.925 h0.94; Top Overlay "M0" at 14.441,25.465 h0.94; Top Overlay "EN" at 14.441,28.005 h0.94
U4: Top Overlay "SLP" at 32.67,15.305 h0.94; Top Overlay "GND" at 42.83,11.495 h0.94 r180; Top Overlay "FAULT" at 42.83,14.035 h0.94 r180; Top Overlay "A2" at 42.83,16.575 h0.94 r180; Top Overlay "A1" at 42.83,19.115 h0.94 r180; Top Overlay "B1" at 42.83,21.655 h0.94 r180; Top Overlay "B2" at 42.83,24.195 h0.94 r180; Top Overlay "GND" at 42.83,26.735 h0.94 r180; Top Overlay "Vmot" at 42.83,29.275 h0.94 r180; Top Overlay "DIR" at 32.67,10.225 h0.94; Top Overlay "STEP" at 32.67,12.765 h0.94; Top Overlay "RST" at 32.67,17.845 h0.94; Top Overlay "M2" at 32.67,20.385 h0.94; Top Overlay "M1" at 32.67,22.925 h0.94; Top Overlay "M0" at 32.67,25.465 h0.94; Top Overlay "EN" at 32.67,28.005 h0.94
U$2: Top Overlay "39" at 3.649,69.568 h1.97 r270; Top Overlay "37" at 6.189,69.568 h1.97 r270; Top Overlay "35" at 8.729,69.568 h1.97 r270; Top Overlay "33" at 11.269,69.568 h1.97 r270; Top Overlay "31" at 13.809,69.568 h1.97 r270; Top Overlay "29" at 16.349,69.568 h1.97 r270; Top Overlay "27" at 18.889,69.568 h1.97 r270; Top Overlay "25" at 21.429,69.568 h1.97 r270; Top Overlay "23" at 23.969,69.568 h1.97 r270; Top Overlay "21" at 26.509,69.568 h1.97 r270; Top Overlay "19" at 29.049,69.568 h1.97 r270; Top Overlay "17" at 31.589,69.568 h1.97 r270; Top Overlay "15" at 34.129,69.568 h1.97 r270; Top Overlay "13" at 36.669,69.568 h1.97 r270; Top Overlay "11" at 39.209,69.568 h1.97 r270; Top Overlay "9" at 41.749,68.298 h1.97 r270; Top Overlay "7" at 44.289,68.298 h1.97 r270; Top Overlay "5" at 46.829,68.298 h1.97 r270; Top Overlay "3" at 49.369,68.298 h1.97 r270; Top Overlay "2" at 51.401,60.17 h1.97 r270; Top Overlay "4" at 48.861,60.17 h1.97 r270; Top Overlay "6" at 46.321,60.17 h1.97 r270; Top Overlay "8" at 43.781,60.17 h1.97 r270; Top Overlay "10" at 41.241,60.17 h1.97 r270; Top Overlay "12" at 38.701,60.17 h1.97 r270; Top Overlay "14" at 36.161,60.17 h1.97 r270; Top Overlay "16" at 33.621,60.17 h1.97 r270; Top Overlay "18" at 31.081,60.17 h1.97 r270; Top Overlay "20" at 28.541,60.17 h1.97 r270; Top Overlay "22" at 26.001,60.17 h1.97 r270; Top Overlay "24" at 23.461,60.17 h1.97 r270; Top Overlay "26" at 20.921,60.17 h1.97 r270; Top Overlay "28" at 18.381,60.17 h1.97 r270; Top Overlay "30" at 15.841,60.17 h1.97 r270; Top Overlay "32" at 13.301,60.17 h1.97 r270; Top Overlay "34" at 10.761,60.17 h1.97 r270; Top Overlay "36" at 8.221,60.17 h1.97 r270; Top Overlay "38" at 5.681,60.17 h1.97 r270; Top Overlay "40" at 3.141,60.17 h1.97 r270; Top Overlay "RPi3" at 53.941,65.885 h1.97 r270; Top Overlay "1" at 51.909,68.298 h1.97 r270